# Altium PCB EKG.PcbDoc
Units mm, origin at the board's own origin, x right, y up, seen from the top; angles counter-clockwise.
Board outline 29.24 x 55.01 mm, 2 copper layers (Top Layer, Bottom Layer); 72 components, 57 nets, 224 pads, 0 vias.
Unrouted connection lines stored in the file: 143.
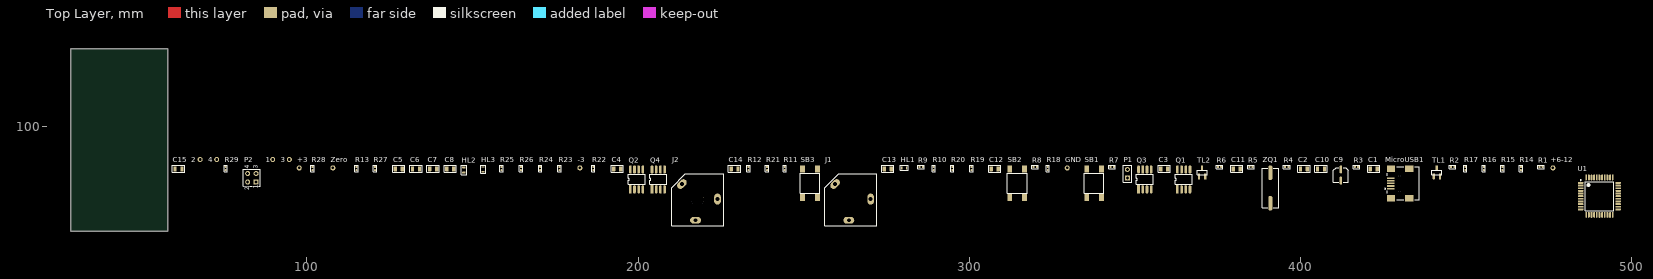
[diagram p0: Top Layer view]
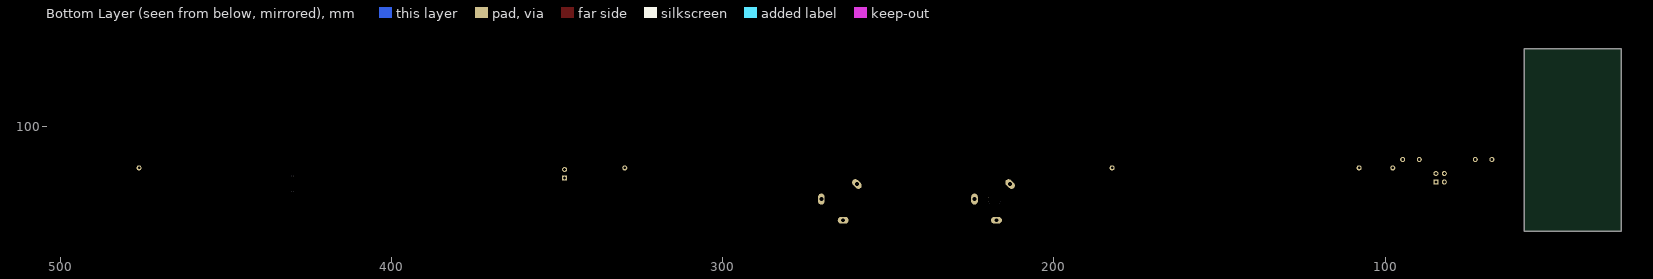
[diagram p1: Bottom Layer view, seen from below]

## Layer stack, top to bottom
Top Solder: solder mask 0.0102, Solder Resist, Dk 3.5
Top Layer: signal copper 0.0356
Dielectric 1: dielectric 0.32, FR-4, Dk 4.8
Bottom Layer: signal copper 0.0356
Bottom Solder: solder mask 0.0102, Solder Resist, Dk 3.5

## Board outline
28.78,68.29 58.02,68.29 58.02,123.3 28.78,123.3

## Design rules (kind name [scope] priority, off if disabled: settings)
Clearance [All] p1: gap=0.254 ignorepadtopadclearanceinfootprint=FALSE except(0: Arc-Hole Track-Hole SMDPad-Hole THPad-Hole Via-Hole Fill-Hole Poly-Hole Region-Hole Text-Hole)
Height [All] p1: minheight=0 maxheight=254 prefheight=12.7
PolygonConnect [All] p1: connectstyle=Relief reliefconductorwidth=0.254 reliefentries=4 polygonreliefangle="90 Angle" airgapwidth=0.254
RoomDefinition EKG [InComponentClass('EKG')] p1: confinementstyle=ConfineIn formatcopy=TRUE lockcomponents=FALSE outline 59.17,69.7 497.699,69.7 497.699,90.93 59.17,90.93
RoutingVias [All] p1: holewidth=0.711 width=1.27 viastyle="Through Hole" minholewidth=0.711 minwidth=1.27 maxholewidth=0.711 maxwidth=1.27
SolderMaskExpansion [All] p1: expansion=0.102
Width [All] p1: maxlimit=0.254 minlimit=0.254 preferedwidth=0.254
29 further rules are at their usual default settings.

## Components (designator, comment, footprint, x,y, rotation, side; value= is the part's Value field where it differs from the comment)
1 "BTRin+" PIN 89.69,89.92 r90 top
2 "BTRin-" PIN 67.77,89.92 r90 top
3 "inBTRmdl+" PIN 94.71,89.92 r90 top
4 "inBTRmdl-" PIN 72.79,89.92 r90 top
+3 "PIN" PIN 97.7,87.38 r0 top
+6-12 "PIN" PIN 476.189,87.38 r90 top
-3 "PIN" PIN 182.43,87.38 r0 top
C1 "/Укажите код маркировки/" C_0805_Manual_mount 422.049,87.1 r0 top value="0,1 мк"
C2 "/Укажите код маркировки/" C_0805_Manual_mount 400.999,87.1 r0 top value="0,1 мк"
C3 "/Укажите код маркировки/" C_0805_Manual_mount 358.849,87.1 r0 top value="0,1 мк"
C4 "/Укажите код маркировки/" C_0805_Manual_mount 193.69,87.1 r0 top value="0,1 мк"
C5 "/Укажите код маркировки/" C_0805_Manual_mount 127.78,87.1 r0 top value="0,1 мк"
C6 "/Укажите код маркировки/" C_0805_Manual_mount 132.95,87.1 r0 top value="0,1 мк"
C7 "/Укажите код маркировки/" C_0805_Manual_mount 138.12,87.1 r0 top value="0,1 мк"
C8 "/Укажите код маркировки/" C_0805_Manual_mount 143.29,87.1 r0 top value="0,1 мк"
C9 "/Укажите код маркировки/" C_Al_B 412.169,85.25 r0 top value="100 мк"
C10 "/Укажите код маркировки/" C_0805_Manual_mount 406.169,87.1 r0 top value="0,1 мк"
C11 "/Укажите код маркировки/" C_0805_Manual_mount 380.719,87.1 r0 top value="0,1 мк"
C12 "/Укажите код маркировки/" C_0805_Manual_mount 307.649,87.1 r0 top value="0,1 мк"
C13 "/Укажите код маркировки/" C_0805_Manual_mount 275.379,87.1 r0 top value="0,1 мк"
C14 "/Укажите код маркировки/" C_0805_Manual_mount 229.13,87.1 r0 top value="0,1 мк"
C15 "/Укажите код маркировки/" C_0805_Manual_mount 61.25,87.1 r0 top value="0,1 мк"
GND "PIN" PIN 329.549,87.38 r90 top
HL1 "/Укажите код маркировки/" LED_0603_Green_Auto_mount 280.329,87.38 r0 top
HL2 "/Укажите код маркировки/" LED_0603_Blue_Manual_mount 147.41,86.74 r90 top
HL3 "/Укажите код маркировки/" LED_0603_Green_Auto_mount 153.22,86.95 r90 top
J1 "Phonejack3" JACK/6-V3 264.209,77.78 r0 top
J2 "Phonejack3" JACK/6-V3 217.96,77.78 r0 top
MicroUSB1 "629105150921" USB/SM0.8-6H5 435.069,82.71 r0 top
P1 "Header 2" HDR1X2 347.709,84.36 r90 top
P2 "Header 2X2" HDR2X2 84.68,83.14 r90 top
Q1 "AD705" SOP8 362.799,80.9 r90 top
Q2 "AD620" SOP8 197.64,80.9 r90 top
Q3 "OP97" SOP8 351.079,80.9 r90 top
Q4 "AD620" SOP8 204.19,80.9 r90 top
R1 "/Укажите код маркирвки/" R_0402_Manual_mount 472.589,87.68 r0 top value="1 к"
R2 "/Укажите код маркирвки/" R_0402_Manual_mount 445.909,87.68 r0 top value="1 к"
R3 "/Укажите код маркирвки/" R_0402_Manual_mount 416.869,87.68 r0 top value="1 к"
R4 "/Укажите код маркирвки/" R_0402_Manual_mount 395.809,87.68 r0 top value="1 к"
R5 "/Укажите код маркирвки/" R_0402_Manual_mount 385.019,87.68 r0 top value="1 к"
R6 "/Укажите код маркирвки/" R_0402_Manual_mount 375.539,87.68 r0 top value="1 к"
R7 "/Укажите код маркирвки/" R_0402_Manual_mount 343.099,87.68 r0 top value="1 к"
R8 "/Укажите код маркирвки/" R_0402_Manual_mount 319.859,87.68 r0 top value="1 к"
R9 "/Укажите код маркирвки/" R_0402_Manual_mount 285.439,87.68 r0 top value="1 к"
R10 "/Укажите код маркирвки/" R_0402_Manual_mount 289.249,87.18 r90 top value="1 к"
R11 "/Укажите код маркирвки/" R_0402_Manual_mount 244.27,87.18 r90 top value="1 к"
R12 "/Укажите код маркирвки/" R_0402_Manual_mount 233.35,87.18 r90 top value="1 к"
R13 "/Укажите код маркирвки/" R_0402_Manual_mount 114.97,87.18 r90 top value="1 к"
R14 "/Укажите код маркирвки/" R_0402_Manual_mount 466.499,87.18 r90 top value="1 к"
R15 "/Укажите код маркирвки/" R_0402_Manual_mount 460.909,87.18 r90 top value="1 к"
R16 "/Укажите код маркирвки/" R_0402_Manual_mount 455.319,87.18 r90 top value="1 к"
R17 "/Укажите код маркирвки/" R_0402_Manual_mount 449.729,87.18 r90 top value="1 к"
R18 "/Укажите код маркирвки/" R_0402_Manual_mount 323.669,87.18 r90 top value="1 к"
R19 "/Укажите код маркирвки/" R_0402_Manual_mount 300.689,87.18 r90 top value="1 к"
R20 "/Укажите код маркирвки/" R_0402_Manual_mount 294.839,87.18 r90 top value="1 к"
R21 "/Укажите код маркирвки/" R_0402_Manual_mount 238.94,87.18 r90 top value="1 к"
R22 "/Укажите код маркирвки/" R_0402_Manual_mount 186.47,87.18 r90 top value="1 к"
R23 "/Укажите код маркирвки/" R_0402_Manual_mount 176.3,87.18 r90 top value="1 к"
R24 "/Укажите код маркирвки/" R_0402_Manual_mount 170.45,87.18 r90 top value="1 к"
R25 "/Укажите код маркирвки/" R_0402_Manual_mount 158.76,87.18 r90 top value="1 к"
R26 "/Укажите код маркирвки/" R_0402_Manual_mount 164.61,87.18 r90 top value="1 к"
R27 "/Укажите код маркирвки/" R_0402_Manual_mount 120.56,87.18 r90 top value="1 к"
R28 "/Укажите код маркирвки/" R_0402_Manual_mount 101.75,87.18 r90 top value="1 к"
R29 "/Укажите код маркирвки/" R_0402_Manual_mount 75.5,87.18 r90 top value="1 к"
SB1 "Tact_switch" Tact_switch_6x6x13 337.649,82.76 r90 top
SB2 "Tact_switch" Tact_switch_6x6x13 314.409,82.76 r90 top
SB3 "Tact_switch" Tact_switch_6x6x13 251.889,82.76 r90 top
TL1 "tl431" SOT23 439.639,86.69 r0 top
TL2 "tl431" SOT23 368.759,86.69 r0 top
U1 "ATmega32U4-AU" 44ML_N 490.22,78.86 r0 top
Zero "PIN" PIN 107.88,87.38 r90 top
ZQ1 "/Укажите код маркировки/" HC-49SM 390.869,81.31 r90 top value="16 МГц"

## Footprints (in the part's own frame and the unit in brackets; to place one, negate y for a bottom-side part, rotate by r counter-clockwise, add the part's x,y. Pads: shape width x height; smd on the part's side, far side on the other; paste and mask are expansions set on the pad)
44ML_N [mm] "Thin QFP, 44-Leads, Body 10x10mm, Pitch 0.8mm, IPC Medium Density"
  oval 1.75x0.55 smd: 1(-5.65,4) 2(-5.65,3.2) 3(-5.65,2.4) 4(-5.65,1.6) 5(-5.65,0.8) 6(-5.65,0) 7(-5.65,-0.8) 8(-5.65,-1.6) 9(-5.65,-2.4) 10(-5.65,-3.2) 11(-5.65,-4) 23(5.65,-4) 24(5.65,-3.2) 25(5.65,-2.4) 26(5.65,-1.6) 27(5.65,-0.8) 28(5.65,0) 29(5.65,0.8) 30(5.65,1.6) 31(5.65,2.4) 32(5.65,3.2) 33(5.65,4)
  oval 0.55x1.75 smd: 12(-4,-5.65) 13(-3.2,-5.65) 14(-2.4,-5.65) 15(-1.6,-5.65) 16(-0.8,-5.65) 17(0,-5.65) 18(0.8,-5.65) 19(1.6,-5.65) 20(2.4,-5.65) 21(3.2,-5.65) 22(4,-5.65) 34(4,5.65) 35(3.2,5.65) 36(2.4,5.65) 37(1.6,5.65) 38(0.8,5.65) 39(0,5.65) 40(-0.8,5.65) 41(-1.6,5.65) 42(-2.4,5.65) 43(-3.2,5.65) 44(-4,5.65)
  silkscreen extent -5.77,-4.35 4.35,4.95, body extent -5,-5 5,5, height 1.2
C_0805_Manual_mount [mm] "SMD 0805 (2012)"
  rrect25% 1x1.5 smd: 1(-1.05,0) 2(1.05,0)
  silkscreen extent -1.85,-1.05 1.85,1.05, body extent -1.05,-0.65 1.05,0.65, height 1.3
C_Al_B [mm] "D=4; L=5.4; A=4.3; P=1."
  oval 0.8x2.4 smd: 1(0,1.7) 2(0,-1.7)
  silkscreen extent -2.25,-2.25 2.25,2.25, body extent -2.15,-2.3 2.15,2.3, height 5.4
HC-49SM [mm] "SMD quartz"
  oval 4.5x1.2 smd: 1(-4.6,0) 2(4.6,0)
  silkscreen extent -5.95,-2.5 5.95,2.5, body extent -6.25,-2.4 6.25,2.4, height 4
HDR1X2 [mm] "Connector; Header; 2 Position"
  rect 1.5x1.5 hole 0.9: 1(0,0)
  round 1.5 hole 0.9: 2(2.54,0)
  silkscreen extent -1.27,-1.27 3.81,1.27
HDR2X2 [mm] "Connector; Header; 2x2 Position"
  rect 1.5x1.5 hole 0.9: 1(0,0)
  round 1.5 hole 0.9: 2(0,2.54) 3(2.54,0) 4(2.54,2.54)
  silkscreen extent -1.27,-1.27 3.81,3.81
JACK/6-V3 [mm] "Connector; Jack Socket, 1/4\" [6.5mm], Thru-Hole, 3 Position, Vertical, Body 15.7 x 15.7 x 31 mm (WxTxH)"
  oval 2x3.3 hole 1.2: 1(6,0.2)
  oval 3.3x2 hole 1.2: 3(-0.6,-6.2)
  oval 2x3.3 hole 1.2 rot 135: 5(-4.738,4.738)
  round 3.7 hole 4: MH1(0,0)
  silkscreen extent -7.85,-7.85 7.85,7.85
LED_0603_Blue_Manual_mount [mm] "SMD 0603"
  rrect35% 0.6x1 smd: A(0.8,0) C(-0.8,0)
  silkscreen extent -1.4,-0.8 1.4,0.8, body extent -0.8,-0.43 0.8,0.43, height 0.45
LED_0603_Green_Auto_mount [mm] "SMD 0603"
  rrect35% 0.4x0.95 smd: A(0.7,0) C(-0.7,0)
  silkscreen extent -1.2,-0.77 1.2,0.77, body extent -0.8,-0.43 0.8,0.43, height 0.45
PIN [mil]
  round 60 hole 30: 1(0,0)
R_0402_Manual_mount [mm] "SMD 0402"
  rrect50% 0.6x0.6 smd: 1(-0.5,0) 2(0.5,0)
  silkscreen extent -1,-0.5 1,0.5, body extent -0.5,-0.25 0.5,0.25, height 0.35
SOP8 [mm]
  rect 2.5x0.8 smd: 1(0,0)
  oval 2.5x0.8 smd: 2(0,-1.27) 3(0,-2.54) 4(0,-3.81) 5(6,-3.81) 6(6,-2.54) 7(6,-1.27) 8(6,0)
  silkscreen extent 1.5,-4.44 4.5,0.64
SOT23 [mm]
  rrect50% 0.7x1.75 smd: 0(0.55,-1.875) 1(2.45,-1.9)
  rrect50% 0.7x1.5 smd: 2(1.5,0.7)
  silkscreen extent 0,-1.4 3,0
Tact_switch_6x6x13 [mm] "Tact switch"
  rect 2.1x1.4 smd: 1(-4.35,2.25) 1(4.35,2.25) 2(-4.35,-2.25) 2(4.35,-2.25)
  silkscreen extent -3,-3 3,3, body extent -5,-3 5,3, height 13
USB/SM0.8-6H5 [mm] "Connector; USB2.0, Type B, SM; 5 Position; Right Angle"
  rect 2.3x0.5 smd: 1(-7.85,-1.6) 2(-7.85,-0.8) 3(-7.85,0) 4(-7.85,0.8) 5(-7.85,1.6)
  rect 2.5x2 smd: 6(-7.75,4.45) 7(-2.25,4.45) 8(-7.75,-4.45) 9(-2.25,-4.45)
  round 0.6 hole 0.9 unplated: MH1(-5.25,2.2) MH2(-5.25,-2.2)
  silkscreen extent -9.67,-4.95 0.7,4.95, body extent -8.9,-4.95 0.7,4.95, height 3.9

## Part data
1 2 3 4: library part PIN
C1 C2 C3 C4 C5 C6 C7 C8 C10 C11 C12 C13 C14 C15: library part "Capacitor 0805", "SMD Capacitor 0805", Manufacturer="/Укажите компанию-производителя/", Rated voltage="6 В", Temperature coefficient="/Формат: ±? ppm/°C/", Temperature range="/Формат: -? ... ? °C/", Tolerance="/Укажите допуск в процентах/", Size=0805, TC="/Укажите тип диэлектрика/", Type="Конденсатор керамический"
C9: library part Capacitor_Electrolytic, "SMD Electrolytic Capacitor", Manufacturer="/Укажите компанию-производителя/", Rated voltage="25 В", Temperature range="/Формат: -? ... ? °C/", Tolerance="/Укажите допуск в процентах/", ESR="/Укажите значение ЭПС/", Size="/Укажите типоразмер/", Type="Конденсатор электролитический"
HL1 HL2 HL3: library part LED, "LED", Color="/Укажите цвет/", Forward voltage="/Укажите прямое напряжение/", Manufacturer="/Укажите компанию-производителя/", Max. forward current="/Укажите допустимый прямой ток/", Max. reverse voltage="/Укажите максимальное обратное напряжение/", Power dissitipation="/Укажите максимальную рассеиваемую мощность/", Temperature range="/Формат: -? ... ? °C/", Size="/Укажите дюймовый типоразмер/", Type=Светодиод
J1 J2: "Jack Socket, 1/4\" [6.5mm], Thru-Hole, Vertical, 3-Conductor Open Circuit (Non-Normalling)", PackageDocument=2003, ComponentLink1Description="Manufacturer Link", ComponentLink1URL=http://www.cliffuk.co.uk/, DatasheetDocument=2003, DrillAndSlotSize="Corresponds to nominal value.", LatestRevisionDate=15-Jul-2004, LatestRevisionNote="Component Replaced.", PackageReference=S1VS_SSS, PCB_Layout="Complies with manufacturer's recommendation.", Published=15-Jul-2004, Publisher="Altium Limited"
MicroUSB1: "Micro USB 2.0 Type AB Horizontal WR-COM", ComponentLink1Description=Manufacturer, ComponentLink1URL=http://www.we-online.de, ComponentLink2Description=Datasheet, ComponentLink2URL=http://katalog.we-online.de/em/datasheet/629105150921.pdf, Construction=SMT, Gender=Receptacle, Interface Type="Type AB", Part Number=629105150921, Published Date="April 2017", Publisher="Wurth Elektronik", Sub-Family="Micro USB 2.0", Type=Horizontal
P1: "Header, 2-Pin", LatestRevisionDate=17-Jul-2002, LatestRevisionNote="Re-released for DXP Platform.", Publisher="Altium Limited"
P2: "Header, 2-Pin, Dual row", LatestRevisionDate=17-Jul-2002, LatestRevisionNote="Re-released for DXP Platform.", Publisher="Altium Limited"
R1 R2 R3 R4 R5 R6 R7 R8 R9 R10 R11 R12 R13 R14 R15 R16 R17 R18 R19 R20 R21 R22 R23 R24 R25 R26 R27 R28 R29: library part "Resistor 0402", "SMD Resistor 0402", Manufacturer="/Укажите компанию-производителя/", Power dissitipation="0,0625 Вт", Temperature coefficient="/Формат: ±? ppm/°C/", Temperature range="/Формат: -? ... ? °C/", Tolerance="/Укажите допуск в процентах/", Size=0402, Type="Резистор постоянный"
SB1 SB2 SB3: "SMD pushbutton", Junction resistance="100 мОм", Manufacturer=NONAME, Rated current="50 мА", Rated voltage="12 В", Life cycles=100000, Type="Выключатель кнопочный с самовозвратом"
U1: "8-bit AVR Microcontroller, 2.7-5.5V, 32KB Flash, 2.5KB EEPROM, 1KB SRAM, USB Controller, 44-pin TQFP, Industrial Grade (-40°C to 85°C)", Supplier Part Number 1=ATMEGA32U4-AU-ND, ComponentLink1Description="Manufacturer Link", ComponentLink1URL=http://www.atmel.com/products/avr/default.asp?, ComponentLink2Description="ATmega16U4/32U4 Datasheet", ComponentLink2URL=http://www.atmel.com/dyn/resources/prod_documents/doc7766.pdf, ComponentLink3Description="ATmega16U4 ATmega32U4 Summary", ComponentLink3URL=http://www.atmel.com/dyn/resources/prod_documents/7766S.pdf, ComponentLink4Description="Atmel.com Home", ComponentLink4URL=http://www.atmel.com, DatasheetVersion="revD, Jan-2009", PackageDescription="44-Pin Plastic Thin Quad Flat Pack, 10 x 10 x 1.0 mm Body, 0.8 mm Pitch (TQFP)", PackageReference=44ML, PackageVersion="rev.G, Jul-2007", Published=1-Apr-2010, Publisher="Altium Limited", Supplier 1=Digi-Key, Supplier 2=Farnell, Supplier 3=Mouser, Supplier Part Number 2=1748525, Supplier Part Number 3=556-ATMEGA32U4-AU
ZQ1: library part Quartz, "QUARTZ CRYSTAL", Frequency stability="/Формат: ±? ppm/", Load capacitance="/Укажите номинал нагрузочной емкости/", Manufacturer="/Укажите компанию-производителя/", Temperature range="/Формат: -? ... ? °C/", Type="Кварцевый резонатор"

## Nets (pads, with @x,y where several pads share a name; then routed paths per layer and width w, separated by ;. In a path a pad name is that pad's centre, name@x,y a point inside that pad or via, vN(x,y) a via of type N, cw(c..) or ccw(c..) an arc to the next point about the centre after c; other vN are vias at no path point)
+3V: +3.1 C1.1 C6.1 C8.1 C12.1 C13.2 C14.1 Q1.7 Q2.7 Q3.7 Q4.7 R1.2 R2.2 R14.2 R15.1 R18.2 R20.2 R21.2 TL1.0 U1.2 U1.14 U1.24 U1.34 U1.42 U1.44
-3V: 2.1 4.1 -3.1 C3.2 C5.1 C7.1 C9.2 C10.1 C11.1 C15.2 HL1.C MicroUSB1.5 P1.2 P2.3 P2.4 Q1.4 Q2.4 Q3.4 Q4.4 R7.1 R8.2 R29.2 SB1.2 SB2.2 SB3.2 TL2.2 U1.5 U1.15 U1.23 U1.35 U1.43
analogSignal: Q4.6 U1.40
BTN1: C12.2 R18.1 SB1.1 U1.12
BTN2: C13.1 R20.1 SB2.1 U1.30
BTN3: C14.2 R21.1 SB3.1 U1.29
BtrTest: 1.1 3.1 U1.41
BZR: P1.1 U1.19
H1: J1.1 Q2.2
H2: J1.3 Q2.3
HWB: P2.2 R14.1 U1.33
LCD_DC: R26.2 U1.22
LCD_RST: R27.2 U1.25
LED: R19.1 U1.28
LEG: C2.1 J2.1 J2.3 Q1.6 R6.2
Net+6-12_1: +6-12.1 R1.1
NetC2_2: C2.2 R4.2
NetC4_1: C4.1 Q2.6
NetC4_2: C4.2 Q4.3 R13.1
NetC9_1: C9.1 U1.6
NetC10_2: C10.2 U1.16 ZQ1.2
NetC11_2: C11.2 U1.17 ZQ1.1
NetGND_1: GND.1 R8.1
NetHL1_A: HL1.A R19.2
NetHL2_A: HL2.A R25.1
NetHL2_C: HL2.C
NetHL3_A: HL3.A R22.1
NetHL3_C: HL3.C
NetLCD_3: R23.1
NetLCD_4: R24.1
NetLCD_5: R26.1
NetLCD_6: R27.1
NetLCD_7: R28.1
NetMicroUSB1_2: MicroUSB1.2 R16.2
NetMicroUSB1_3: MicroUSB1.3 R17.2
NetQ1_2: Q1.2 R4.1 R6.1 R9.1 R10.2
NetQ2_1: Q2.1 R9.2 R11.2
NetQ2_8: Q2.8 R10.1 R11.1
NetQ3_2: Q3.2 Q3.6
NetQ4_1: Q4.1 R12.2
NetQ4_8: Q4.8 R12.1
NetQ5_2: R29.1
NetR2_1: R2.1 R3.2 TL1.1
NetR5_1: R5.1 R7.2 TL2.1
NetR16_1: R16.1 U1.3
NetR17_1: R17.1 U1.4
REF: Q2.5 Q4.5
RST: P2.1 R15.2 U1.13
RX_BT: U1.20
SPI_LCD: R28.2 U1.26
SPI_MISO: U1.11
SPI_MOSI: R24.2 U1.10
SPI_SCLK: R23.2 U1.9
SPI_SD: U1.27
TX_BT: U1.21
USBVcc: C15.1 MicroUSB1.1 R22.2 R25.2 U1.7
Zero: C1.2 C3.1 C5.2 C6.2 C7.2 C8.2 J1.5 J2.5 Q1.3 Q3.3 Q4.2 R3.1 R5.2 R13.2 TL1.2 TL2.0 Zero.1
pads on no net: J1.MH1 J2.MH1 MicroUSB1.4 MicroUSB1.6 MicroUSB1.7 MicroUSB1.8 MicroUSB1.9 MicroUSB1.MH1 MicroUSB1.MH2 Q1.1 Q1.5 Q1.8 Q3.1 Q3.5 Q3.8 U1.1 U1.8 U1.18 U1.31 U1.32 U1.36 U1.37 U1.38 U1.39

## Text inside footprints (layer, text, board x,y; h text height)
J1: Mechanical 1 "Alert PCB fab to slot details" at 256.309,87.44 h0.3; Mechanical 1 "Slot 1.2x2.5mm, PTH" at 256.309,86.94 h0.3; Mechanical 1 "Assign keep-out area to slot" at 256.309,87.94 h0.3; Mechanical 1 "Mech 1 - Slot cut-out" at 256.309,86.44 h0.3; Mechanical 1 "Mech 2 - Clearance, move to internal plane if present" at 256.309,85.94 h0.3
J2: Mechanical 1 "Alert PCB fab to slot details" at 210.06,87.44 h0.3; Mechanical 1 "Slot 1.2x2.5mm, PTH" at 210.06,86.94 h0.3; Mechanical 1 "Assign keep-out area to slot" at 210.06,87.94 h0.3; Mechanical 1 "Mech 1 - Slot cut-out" at 210.06,86.44 h0.3; Mechanical 1 "Mech 2 - Clearance, move to internal plane if present" at 210.06,85.94 h0.3
MicroUSB1: Mechanical 1 "PCB Edge" at 435.501,78.673 h0.25 r90
P2: Top Overlay "1" at 85.188,81.108 h1.27 r90; Top Overlay "2" at 82.648,80.6 h1.27 r90; Top Overlay "4" at 82.648,87.204 h1.27 r90; Top Overlay "3" at 85.188,87.204 h1.27 r90